# Altium PCB PCB1.PcbDoc
Units mm, origin at the board's own origin, x right, y up, seen from the top; angles counter-clockwise.
Board outline 102.36 x 69.6 mm, 2 copper layers (Top Layer, Bottom Layer); 56 components, 39 nets, 199 pads, 28 vias.
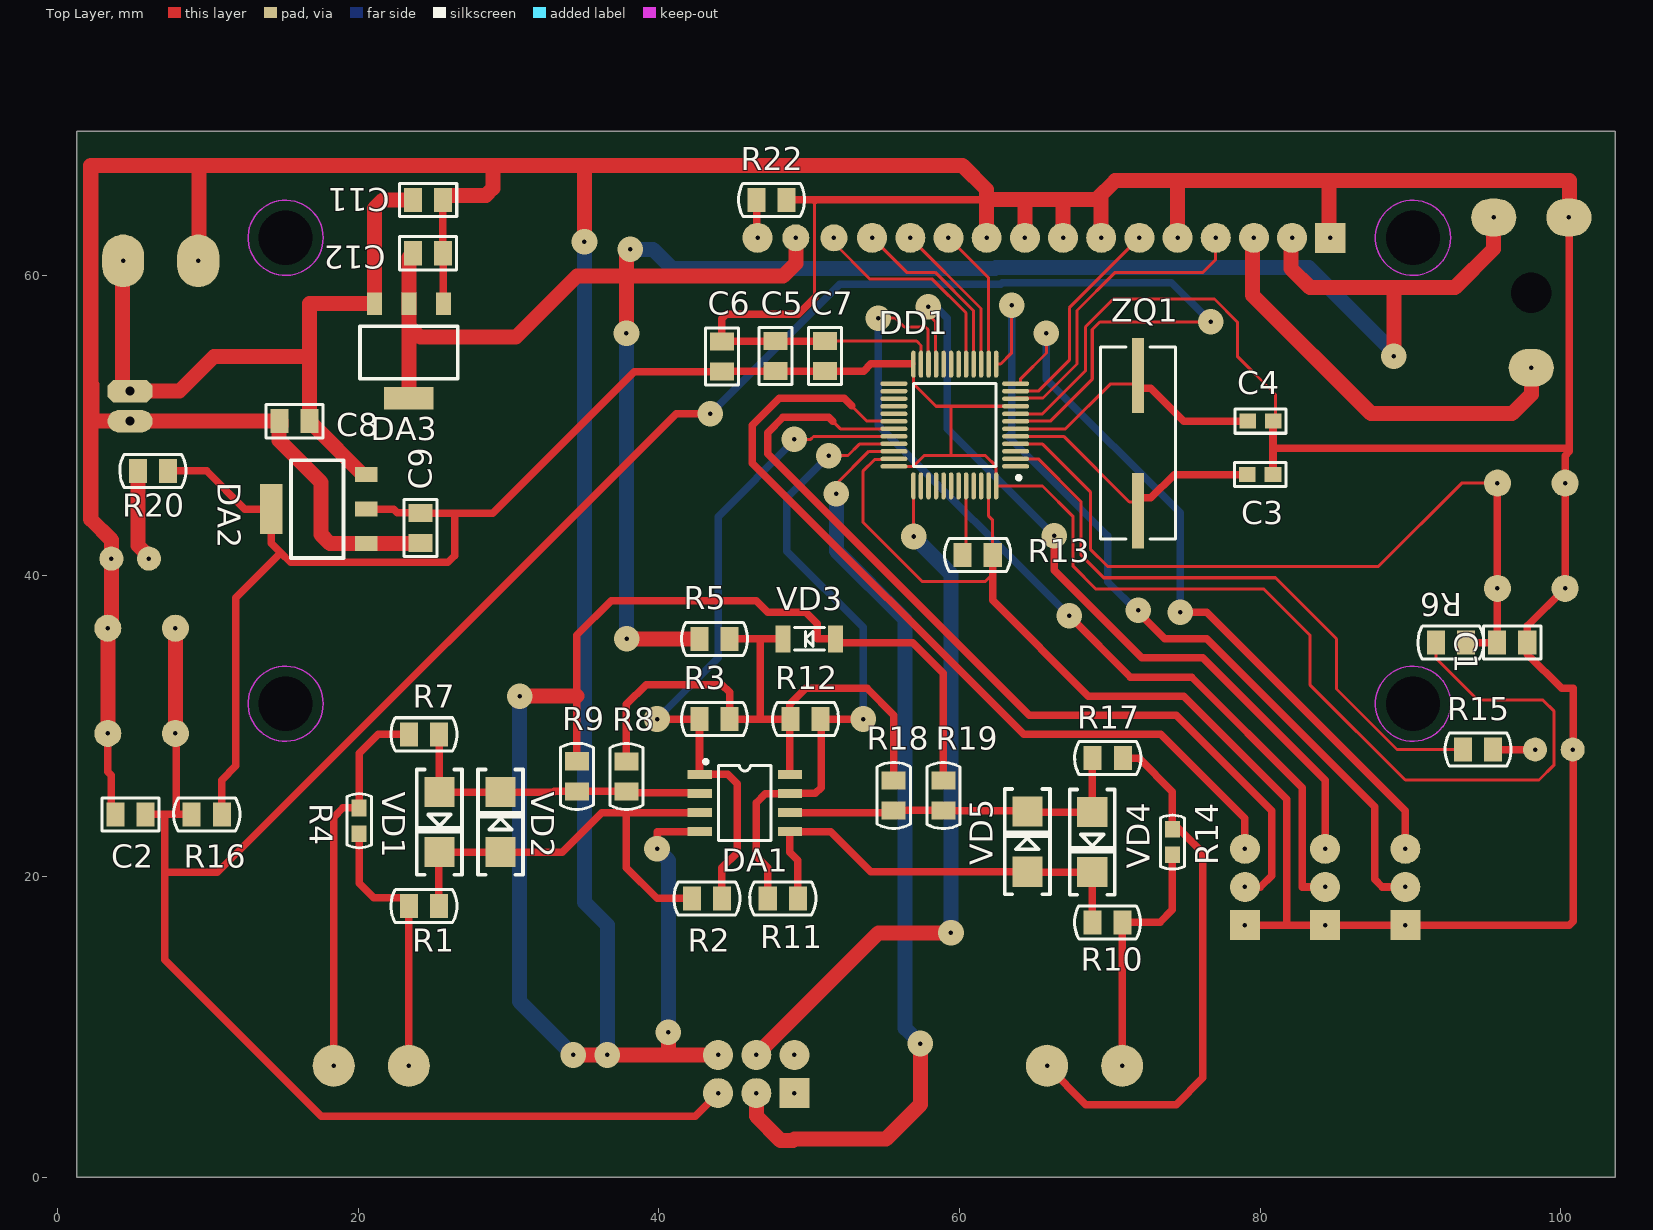
[diagram p0: Top Layer view]
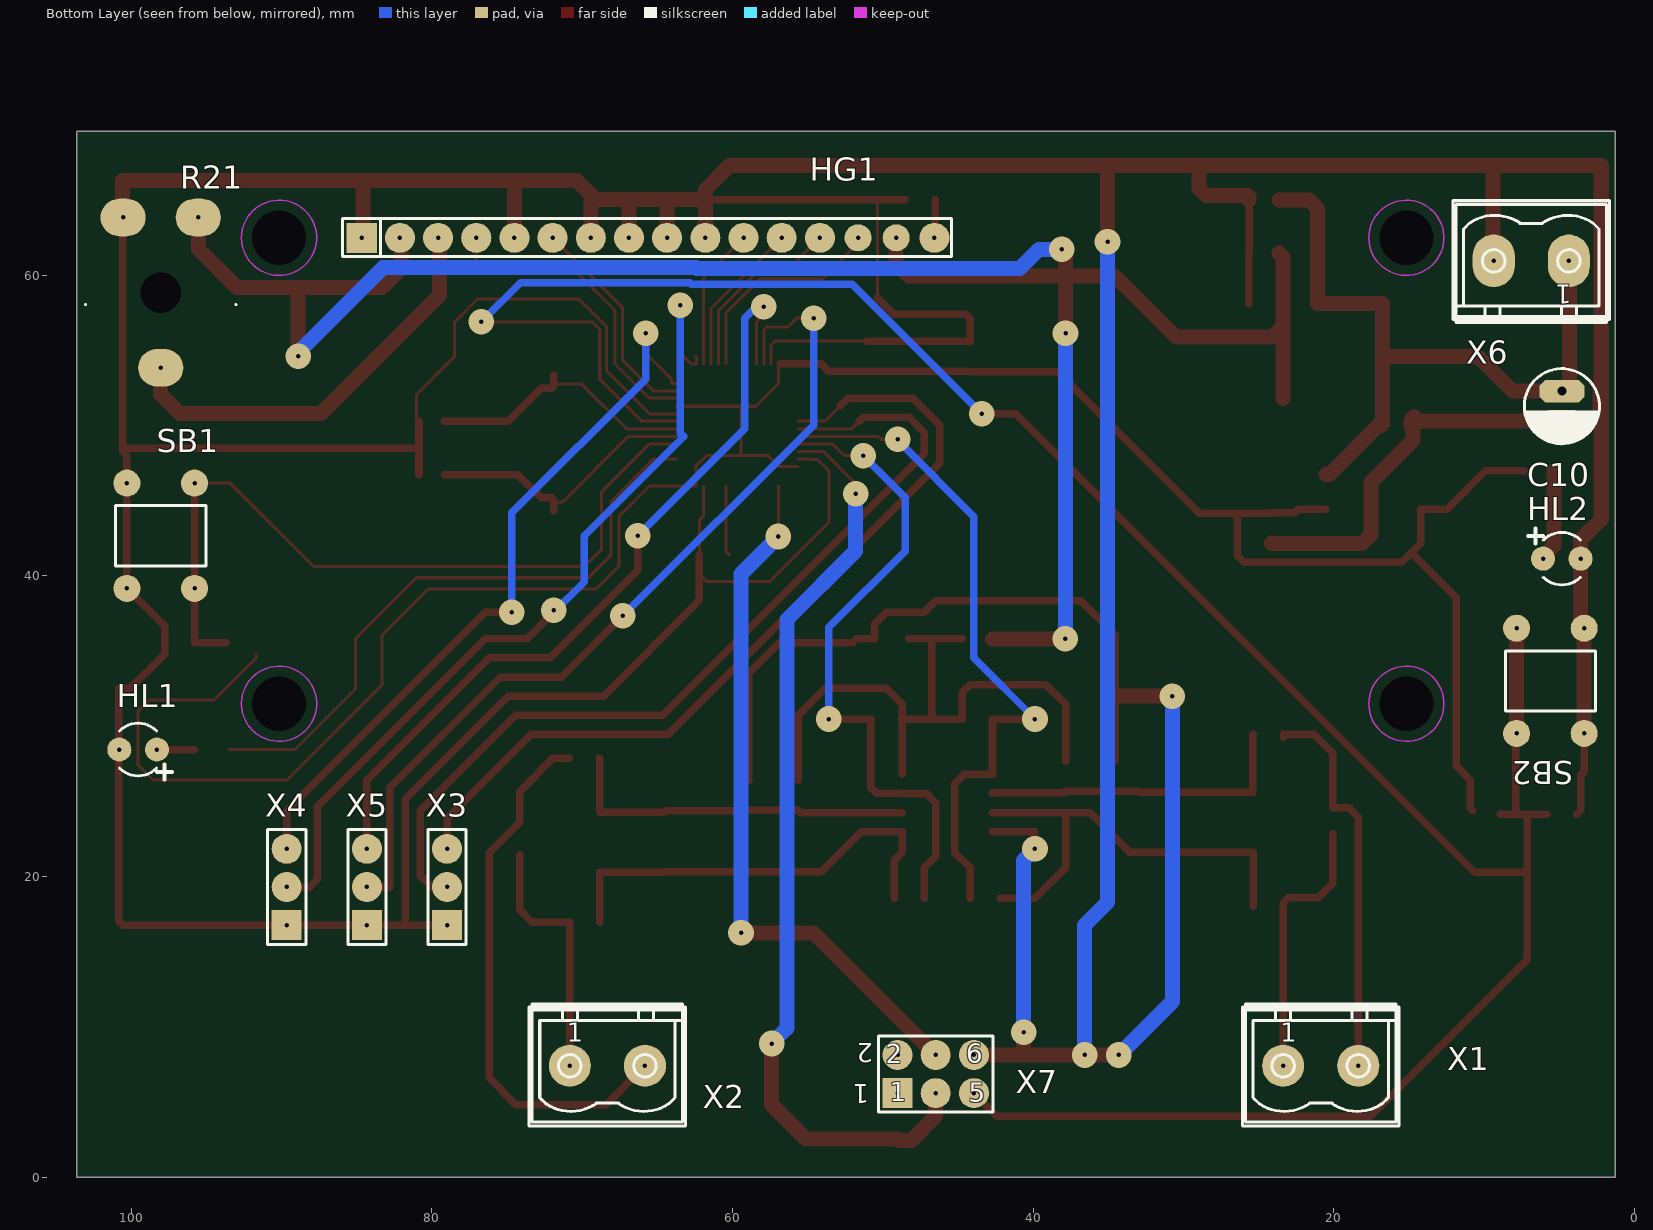
[diagram p1: Bottom Layer view, seen from below]

## Layer stack, top to bottom
Top Solder: solder mask 0.0102, Solder Resist, Dk 3.5
Top Layer: signal copper 0.0356
Dielectric 1: dielectric 0.32, FR-4, Dk 4.8
Bottom Layer: signal copper 0.0356
Bottom Solder: solder mask 0.0102, Solder Resist, Dk 3.5

## Board outline
1.27,0 1.27,62.23 1.27,69.596 103.632,69.596 103.632,0

## Design rules (kind name [scope] priority, off if disabled: settings)
Clearance [All] p1: gap=0.5 ignorepadtopadclearanceinfootprint=FALSE except(0: Arc-SMDPad Arc-Hole Track-SMDPad Track-Hole SMDPad-SMDPad SMDPad-Hole THPad-Hole Via-Hole Fill-Hole Poly-Hole Region-Hole Text-Hole; 0.254: Arc-Arc Arc-Track Arc-THPad Arc-Via Arc-Text Track-Track Track-THPad Track-Via Track-Text SMDPad-THPad SMDPad-Via SMDPad-Text THPad-THPad THPad-Via THPad-Text Via-Via Via-Text Fill-Text Poly-Text Region-Text Text-Text)
PlaneConnect [All] p1: planeconnectstyle=Relief reliefexpansion=0.508 reliefentries=4 reliefconductorwidth=0.7 reliefairgap=0.7
PolygonConnect [All] p1: connectstyle=Relief reliefconductorwidth=0.7 reliefentries=4 polygonreliefangle="90 Angle" airgapwidth=0.254
RoutingVias [All] p1: holewidth=0.711 width=1.27 viastyle="Through Hole" minholewidth=0.711 minwidth=1.27 maxholewidth=0.711 maxwidth=1.27
SolderMaskExpansion [All] p1: expansion=0.102
Width [All] p1: maxlimit=2 minlimit=0.2 preferedwidth=1 minimp=50.000000 maximp=50.000000 favimp=50.000000
29 further rules are at their usual default settings.

## Components (designator, comment, footprint, x,y, rotation, side; value= is the part's Value field where it differs from the comment)
C1 "Capacitor" C0805 96.774,35.56 r180 top value=0.1uF
C2 "Capacitor" C0805 4.842,24.13 r0 top value=0.1uF
C3 "Capacitor" C0603 80.01,46.736 r180 top value=0.022uF
C4 "Capacitor" C0603 80.026,50.292 r180 top value=0.022uF
C5 "Capacitor" C0805 47.752,54.626 r270 top value=0.1uF
C6 "Capacitor" C0805 44.196,54.594 r270 top value=0.1uF
C7 "Capacitor" C0805 51.054,54.626 r270 top value=0.1uF
C8 "Capacitor" C0805 15.748,50.292 r0 top value=0.1uF
C9 "Capacitor" C0805 24.13,43.18 r90 top value=10uF
C10 "Aluminium capacitor, 100μF, 16V, ±20%, 54mOhm, 14x10x5 mm, -55...+105°C" "CAP: D5C2H11" 4.826,51.292 r270 bottom value=100?F
C11 "Capacitor" C0805 24.654,65.024 r180 top value=0.1uF
C12 "Capacitor" C0805 24.638,61.468 r180 top value=10uF
DA1 "COMP_2x_8p" SOIC-8 45.72,24.892 r270 top value=LM293AD
DA2 "LM1117-Series" SOT-223 17.272,44.45 r90 top value=LM1117MPX-3.3
DA3 "LM1117-Series" SOT-223 23.368,54.864 r180 top value=LM1117MPX-3.3
DD1 "STM32F103Cxxx-Series" LQFP-48 59.69,50.038 r180 top value=STM32F103C8T6
HG1 "QC1602AV2_0" "QC1602AV2_0 _PLS" 84.67,62.496 r180 bottom locked
HL1 "Text" LD-3mm-G 99.548,28.448 r0 bottom value=BL-L314UGC
HL2 "Power" LD-3mm-R 4.826,41.148 r180 bottom value=BL-L314HD
R1 "Resistor" R0805 24.368,18.034 r0 top value=10k
R2 "Resistor" R0805 43.196,18.542 r0 top value=33k
R3 "Resistor" R0805 43.704,30.48 r180 top value=1k
R4 "Resistor" R0603 20.066,23.71 r270 top value=20k
R5 "Resistor" R0805 43.704,35.814 r180 top value=470
R6 "Resistor" R0805 92.694,35.56 r0 top value=10k
R7 "Resistor" R0805 24.368,29.464 r0 top value=10k
R8 "Resistor" R0805 37.846,26.654 r90 top value=2k
R9 "Resistor" R0805 34.544,26.67 r270 top value=1k
R10 "Resistor" R0805 69.85,16.954 r180 top value=10k
R11 "Resistor" R0805 48.244,18.542 r180 top value=33k
R12 "Resistor" R0805 49.768,30.48 r0 top value=1k
R13 "Resistor" R0805 61.214,41.402 r180 top value=10k
R14 "Resistor" R0603 74.168,22.288 r270 top value=20k
R15 "Resistor" R0805 94.504,28.448 r0 top value=1k
R16 "Resistor" R0805 9.922,24.13 r180 top value=10k
R17 "Resistor" R0805 69.866,27.876 r180 top value=10k
R18 "Resistor" R0805 55.626,25.4 r90 top value=2k
R19 "Resistor" R0805 58.928,25.384 r270 top value=1k
R20 "Resistor" R0805 6.334,46.99 r180 top value=1k
R21 "Potentiometer" CA9V 95.544,63.848 r0 bottom value=10К
R22 "Resistor" R0805 47.498,65.024 r0 top value=2k
SB1 "Text" TS-A3PS 98.044,42.672 r0 bottom value=TS-A3PS-130
SB2 "Text" TS-A3PS 5.588,33.02 r180 bottom value=TS-A3PS-130
VD1 "Diode" DO-214AC 25.4,23.622 r270 top value=ES1F
VD2 "Diode" DO-214AC 29.464,23.622 r90 top value=ES1F
VD3 "Zener" SOD-80 50.01,35.814 r180 top value=BZV55-C5V1
VD4 "Diode" DO-214AC 68.834,22.288 r270 top value=ES1F
VD5 "Diode" DO-214AC 64.516,22.32 r90 top value=ES1F
X1 "Канал ДОК1" 2EDGV-5.0-02P-14#1 20.868,7.41 r180 bottom
X2 "Канал ДОК2" 2EDGV-5.0-02P-14#1 68.326,7.41 r180 bottom
X3 "Разъем PLS-3" HDR1X3 78.994,16.764 r90 bottom
X4 "Разъем PLS-3" HDR1X3 89.662,16.764 r90 bottom
X5 "Разъем PLS-3" HDR1X3 84.328,16.764 r90 bottom
X6 "Питание" 2EDGV-5.0-02P-14#2 6.858,60.96 r0 bottom
X7 "Вилка SWD _ ST_LINK" PLD6 49.022,5.588 r180 bottom value=SWD
ZQ1 "Crystal" HC-49SM 71.882,48.84 r270 top value=HC49S-8.000MHZ-20pF

## Footprints (in the part's own frame and the unit in brackets; to place one, negate y for a bottom-side part, rotate by r counter-clockwise, add the part's x,y. Pads: shape width x height; smd on the part's side, far side on the other; paste and mask are expansions set on the pad)
2EDGV-5.0-02P-14#1 [mm] "Pin Header 5mm"
  round 2.8 hole 0.3: 1(-2.5,0) 2(2.5,0)
  silkscreen extent -5.2,-4 5.2,4.1, body extent -5,-3.87 5,4.73, height 12
2EDGV-5.0-02P-14#2 [mm] "Pin Header 5mm"
  oval 2.8x3.5 hole 0.3: 1(-2.5,0) 2(2.5,0)
  silkscreen extent -5.2,-4 5.2,4.1, body extent -5,-3.87 5,4.73, height 12
C0603 [mm] "1608M"
  rect 1.1x1 smd: 1(-0.85,0) 2(0.85,0)
  silkscreen extent -1.7,-0.8 1.7,0.8, body extent -0.8,-0.4 0.8,0.4, height 0.91
C0805 [mm] "2012M"
  rect 1.2x1.6 smd: 1(-1,0) 2(1,0)
  silkscreen extent -1.9,-1.1 1.9,1.1, body extent -1,-0.62 1,0.63, height 1.01
CA9V [mm]
  round 0 hole 2.7 unplated: 0(2.5,5)
  oval 3x2.5 hole 0.3: 1(0,0) 2(5,0) 3(2.5,10)
  silkscreen extent -2.55,5.75 7.55,5.85, body extent -2.5,-0.1 7.5,10.1, height 6.15
"CAP: D5C2H11" [mm]
  oct 1.5x3 hole 0.6: 1(-1,0)
  oval 1.5x3 hole 0.6: 2(1,0)
  silkscreen extent -2.5,-2.5 2.5,2.5, body extent -2.75,-2.75 2.75,2.75, height 13.5
DO-214AC [mm] "(SMA) Low profile package"
  rect 2x2 smd: 1(-2,0) 2(2,0)
  silkscreen extent -3.5,-1.5 3.5,1.5, body extent -2.6,-1.3 2.6,1.3, height 2.4
HC-49SM [mm] "HC49 Surface Mount Footprint"
  rect 5x0.8 smd: 1(-4.5,0) 3(4.5,0)
  silkscreen extent -6.4,-2.5 6.4,2.5, body extent -6.25,-2.4 6.25,2.4, height 4.02
HDR1X3 [mm]
  rect 2x2 hole 0.3: 1(0,0)
  round 2 hole 0.3: 2(2.54,0) 3(5.08,0)
  silkscreen extent -1.27,-1.27 6.35,1.27, body extent -1.28,-1.27 6.36,1.27, height 8.54
LD-3mm-G [mm] "3mm DIP Green Led Footprint"
  round 1.6 hole 0.3: 1(-1.25,0) 2(1.25,0)
  silkscreen extent -2.25,-1.75 1.24,2, body extent -1.65,-1.69 1.65,1.61, height 7.01
LD-3mm-R [mm] "3mm DIP Red Led Footprint"
  round 1.6 hole 0.3: 1(-1.25,0) 2(1.25,0)
  silkscreen extent -2.25,-1.75 1.24,2, body extent -1.65,-1.69 1.65,1.61, height 7.01
LQFP-48 [mm] "Thin QFP, 48-Leads, Body 7x7mm, Pitch 0.5mm, IPC Medium Density"
  oval 1.8x0.3 smd: 1(-4.05,2.75) 2(-4.05,2.25) 3(-4.05,1.75) 4(-4.05,1.25) 5(-4.05,0.75) 6(-4.05,0.25) 7(-4.05,-0.25) 8(-4.05,-0.75) 9(-4.05,-1.25) 10(-4.05,-1.75) 11(-4.05,-2.25) 12(-4.05,-2.75) 25(4.05,-2.75) 26(4.05,-2.25) 27(4.05,-1.75) 28(4.05,-1.25) 29(4.05,-0.75) 30(4.05,-0.25) 31(4.05,0.25) 32(4.05,0.75) 33(4.05,1.25) 34(4.05,1.75) 35(4.05,2.25) 36(4.05,2.75)
  oval 0.3x1.8 smd: 13(-2.75,-4.05) 14(-2.25,-4.05) 15(-1.75,-4.05) 16(-1.25,-4.05) 17(-0.75,-4.05) 18(-0.25,-4.05) 19(0.25,-4.05) 20(0.75,-4.05) 21(1.25,-4.05) 22(1.75,-4.05) 23(2.25,-4.05) 24(2.75,-4.05) 37(2.75,4.05) 38(2.25,4.05) 39(1.75,4.05) 40(1.25,4.05) 41(0.75,4.05) 42(0.25,4.05) 43(-0.25,4.05) 44(-0.75,4.05) 45(-1.25,4.05) 46(-1.75,4.05) 47(-2.25,4.05) 48(-2.75,4.05)
  silkscreen extent -4.38,-2.75 2.75,3.62, body extent -4.5,-4.5 4.5,4.5, height 1.5
PLD6 [mm]
  rect 2x2 hole 0.3: 1(0,0)
  round 2 hole 0.3: 2(0,2.54) 3(2.54,0) 4(2.54,2.54) 5(5.08,0) 6(5.08,2.54)
  silkscreen extent -1.27,-1.27 6.35,3.81, body extent -1.25,-1.23 6.37,3.78, height 8.5
"QC1602AV2_0 _PLS" [mm]
  round 0.1 hole 3.6 unplated: 0(-5.5,-31) 0(-5.5,0) 0(69.5,-31) 0(69.5,0)
  rect 2x2 hole 0.3: 1(0,0)
  round 2 hole 0.3: 2(2.54,0) 3(5.08,0) 4(7.62,0) 5(10.16,0) 6(12.7,0) 7(15.24,0) 8(17.78,0) 9(20.32,0) 10(22.86,0) 11(25.4,0) 12(27.94,0) 13(30.48,0) 16(38.1,0)
  round 1.8 hole 0.3: 14(33.02,0) 15(35.56,0)
  Keep-Out Layer circle w0.1: c-5.5,-31 r2.5
  Keep-Out Layer circle w0.1: c-5.5,0 r2.5
  Keep-Out Layer circle w0.1: c69.5,0 r2.5
  Keep-Out Layer circle w0.1: c69.5,-31 r2.5
  silkscreen extent -1.27,-1.25 39.25,1.27, body extent -8,-33.5 72.25,2.5, height 13.4
R0603 [mm] "1608M"
  rect 1.1x1 smd: 1(-0.85,0) 2(0.85,0)
  silkscreen extent -1.8,-0.8 1.8,0.8, body extent -0.8,-0.4 0.8,0.4, height 0.38
R0805 [mm] "2012M"
  rect 1.2x1.6 smd: 1(-1,0) 2(1,0)
  silkscreen extent -2.2,-1.1 2.2,1.1, body extent -1,-0.6 1,0.6, height 0.5
SOD-80 [mm]
  rect 1x1.8 smd: 1(-1.75,0) 2(1.75,0)
  silkscreen extent -1,-0.75 1,0.75, body extent -1.68,-0.74 1.68,0.8, height 1.52
SOIC-8 [mm] "4320.8-А Small Outline; 8 Leads; Body Width 3.9 mm; Pitch 1.27 mm"
  rect 0.6x1.6 smd: 1(-1.905,-3) 2(-0.635,-3) 3(0.635,-3) 4(1.905,-3) 5(1.905,3) 6(0.635,3) 7(-0.635,3) 8(-1.905,3)
  silkscreen extent -2.88,-2.72 2.5,1.75, body extent -2.5,-3.01 2.5,3.01, height 1.75
SOT-223 [mm]
  rect 1x1.5 smd: 1(-2.3,-3.25) 2(0,-3.25) 3(2.3,-3.25)
  rect 3.3x1.5 smd: 2(0,3.05)
  silkscreen extent -3.25,-1.75 3.25,1.75, body extent -3.25,-3.53 3.25,3.43, height 1.65
TS-A3PS [mm] "1 contact, 0.02A, 15V, H=7mm"
  round 1.8 hole 0.3: 1(-2.25,-3.5) 1(-2.25,3.5) 2(2.25,-3.5) 2(2.25,3.5)
  silkscreen extent -3,-2 3,2, body extent -3,-3.75 3,3.75, height 9

## Part data
C1 C2 C5 C6 C7 C8 C11: library part GRM21BR71H104KA01L, Dielectric Type=X7R, Manufacturer=Murata, Tolerance=±10%, Voltage=50V, Working Temperature Max=+125°С, Working Temperature Min=-55°С, Application Category=1, ID=138, Part Number=GRM21BR71H104KA01L, Published=18.05.2010, Publisher="Andrew Danich", Type=Конденсатор
C3 C4: library part GRM188R71E223KA01D, Dielectric Type=X7R, Manufacturer=Murata, Tolerance=±10%, Voltage=25V, Working Temperature Max=+125°С, Working Temperature Min=-55°С, Application Category=1, ID=128, Part Number=GRM188R71E223KA01D, Published=18.05.2010, Publisher="Andrew Danich", Type=Конденсатор
C9 C12: library part GRM21BR61E106KA73L, Dielectric Type=X5R, Manufacturer=Murata, Tolerance=±10%, Voltage=25V, ID=53, Part Number=GRM21BR61E106KA73L, Published=18.05.2010, Publisher="Andrew Danich", Type=Конденсатор
C10: library part Aluminium, Manufacturer=Wurth, Package="14x10x5 mm", PartNumber=860080475013, Temperature=-55...+105°C, Tolerance=±20%, TypeCapacitor="Aluminium capacitor", ValueManufacturerPartNumber="Aluminium capacitor, 100?F, 16V, ±20%, 54mOhm, 14x10x5 mm, -55...+105°C", Voltage=16V, HelpURL=https://www.digikey.com/product-detail/en/wurth-electronics-inc/860080475013/732-9029-1-ND/5728972, Impedance=54mOhm
DA1: library part LM293AD, Input Biasing Current=100nA, Input Offset Voltage=±2mV, Manufacturer="Texas Instruments", Output Saturation Voltage=400mV, Supply Current=1mA, Working Temperature Max=+85°C, Working Temperature Min=-25°C, Application Category=1, Channels=2, Functional Analog="LM2903MX, LM393MX", ID=3, Part Number=LM293AD, Publisher="Viktor Klishin", Response Time=1.3uS, Supply Operation=+2…36V, Type=Микросхема
DA2: library part LM1117MPX-3.3, Input Voltage=+8.5…20V, Output Current=800mA, Output Voltage=+3,3V, ID=9, Part Number=LM1117MPX-3.3, Published=13.08.2015, Publisher="Andrew Danich", Type=Микросхема
DA3: library part LM1117MPX-3.3, Input Voltage=+8.5…20V, Output Current=800mA, Output Voltage=+5V, ID=9, Part Number=LM1117MPX-3.3, Published=13.08.2015, Publisher="Andrew Danich", Type=Микросхема
DD1: library part STM32F103C8T6, Manufacturer=STMicroelectronics, Operation Frequency=72MHz, Working Temperature Max=+85°С, Working Temperature Min=-40°С, Application Category=1, EEPROM=-, Flash=64K, I/O Lines=37, ID=20, Part Number=STM32F103C8T6, Prog Interface="JTAG, SWD, UART", Published=16.10.2015, Publisher="Andrew Danich", SRAM=20K, Supply Operation=+2.0…3.6V, Type=Микросхема
HG1: library part "QC1602AV2_0 _PLS", ChipdipURL=https://www.chipdip.ru/product/bcb1602-03, ComponentLink1Description=Datashet, ComponentLink1URL=https://www.openhacks.com/uploadsproductos/eone-1602a1.pdf, ID=1, Name=LCD16X2, Part Number="QC1602AV2_0 _PLS", Published=28.08.2014, Publisher="Andrew Danich", Type="Индикатор графический"
HL1: library part BL-L314UGC, Color="Ultra Green", Forward Current=30mA, Forward Voltage=2.2V, Power Dissipation=75mW, Application Category=1, ID=1, Leds=1, Part Number=BL-L314UGC, Published=03.12.2013, Publisher="Andrew Danich", Type="Индикатор единичный"
HL2: library part BL-L314HD, Color=Red, Forward Current=25mA, Forward Voltage=2.25V, Power Dissipation=60mW, Application Category=1, ID=2, Leds=1, Part Number=BL-L314HD, Published=03.12.2013, Publisher="Andrew Danich", Type="Индикатор единичный"
R1 R6 R7 R10 R13 R16 R17: library part RC0805JR-0710KL, Limit Voltage=150V, Manufacturer=Yageo, Temperature Coefficient=100ppm, Tolerance=±5%, Total Power Dissipation=0.125W, Working Temperature Max=+155°С, Working Temperature Min=-55°С, Application Category=1, ID=99, Part Number=RC0805JR-0710KL, Published=24.03.2010, Publisher="Andrew Danich", Series Type=Thick-Film, Type=Резистор
R2 R11: library part RC0805JR-0733KL, Limit Voltage=150V, Manufacturer=Yageo, Temperature Coefficient=100ppm, Tolerance=±5%, Total Power Dissipation=0.125W, Working Temperature Max=+155°С, Working Temperature Min=-55°С, Application Category=1, ID=136, Part Number=RC0805JR-0733KL, Published=24.03.2010, Publisher="Andrew Danich", Series Type=Thick-Film, Type=Резистор
R3 R9 R12 R15 R19 R20: library part RC0805JR-071KL, Limit Voltage=150V, Manufacturer=Yageo, Temperature Coefficient=100ppm, Tolerance=±5%, Total Power Dissipation=0.125W, Working Temperature Max=+155°С, Working Temperature Min=-55°С, Application Category=1, ID=112, Part Number=RC0805JR-071KL, Published=24.03.2010, Publisher="Andrew Danich", Series Type=Thick-Film, Type=Резистор
R4 R14: library part RC0603FR-0720KL, Limit Voltage=50V, Manufacturer=Yageo, Temperature Coefficient=100ppm, Tolerance=±1%, Total Power Dissipation=0.1W, Working Temperature Max=+155°С, Working Temperature Min=-55°С, Application Category=1, ID=259, Part Number=RC0603FR-0720KL, Published=24.03.2010, Publisher="Andrew Danich", Series Type=Thick-Film, Type=Резистор
R5: library part RC0805JR-07470RL, Limit Voltage=150V, Manufacturer=Yageo, Temperature Coefficient=100ppm, Tolerance=±5%, Total Power Dissipation=0.125W, Working Temperature Max=+155°С, Working Temperature Min=-55°С, Application Category=1, ID=144, Part Number=RC0805JR-07470RL, Published=24.03.2010, Publisher="Andrew Danich", Series Type=Thick-Film, Type=Резистор
R8 R18 R22: library part RC0805JR-072KL, Limit Voltage=150V, Manufacturer=Yageo, Temperature Coefficient=100ppm, Tolerance=±5%, Total Power Dissipation=0.125W, Working Temperature Max=+155°С, Working Temperature Min=-55°С, Application Category=1, ID=129, Part Number=RC0805JR-072KL, Published=24.03.2010, Publisher="Andrew Danich", Series Type=Thick-Film, Type=Резистор
R21: library part CA9PV10-10KA2020, Nominal value=10, ChipdipURL=https://www.chipdip.ru/product0/9000079478, ComponentLink1Description=Datashet, ComponentLink1URL=https://static.chipdip.ru/lib/250/DOC000250611.pdf, ID=6, Name=Resistor, Part Number=CA9PV10-10KA2020, SortUnit=2, Type=Резистор, Units=К
SB1 SB2: library part TS-A3PS-130, Isolator Resistance=100meg, Limit Current=50mA, Limit Voltage=250V, Resistance=0.1ohm, Application Category=1, Backlight=NO, Height=7mm, ID=24, Number of Contacts=4, Part Number=TS-A3PS-130, Published=17.04.2014, Publisher="Andrew Danich", Type=Переключатель
VD1 VD2 VD4 VD5: library part ES1G, Capacitance=10pF, Forward Current=1A, Forward Voltage=1.3V, Reverse Current=5uA, Reverse Voltage=400V, Total Power Dissipation=1.47W, ID=3, Part Number=ES1G, Published=18.05.2010, Publisher="Andrew Danich", Recovery Time=35nS, Type=Диод
VD3: library part BZV55-C5V1, Capacitance=300pF, Differential resistance=60ohm, Forward Current=250mA, Forward Voltage=0.9V, Reverse Current=2uA, Total Power Dissipation=0.5W, Working Voltage=5.1V, ID=1, Part Number=BZV55-C5V1, Published=20.05.2013, Publisher="Andrew Danich", Type=Стабилитрон
X1 X2 X6: library part "Вилка 2EDGV-5.08-02P"
X3 X4 X5: library part "Вилка 3pin", "Вилка штыревая 2.54мм 1x3 прямая в отверстия"
X7: "Вилка 2x3 pin 2.54 mm в отверстия"
ZQ1: library part HC49SM-8.000MHz-20pF, Load Capacitance=20pF, Output Frequency=8MHz, Temperature Coefficient=±50ppm, Application Category=1, ID=17, Part Number=HC49SM-8.000MHz-20pF, Published=08.03.2013, Publisher="Andrew Danich", Type=Резонатор

## Via types
v1: diameter 1.7, hole 0.3, Top Layer to Bottom Layer, 28 vias

## Nets (pads, with @x,y where several pads share a name; then routed paths per layer and width w, separated by ;. In a path a pad name is that pad's centre, name@x,y a point inside that pad or via, vN(x,y) a via of type N, cw(c..) or ccw(c..) an arc to the next point about the centre after c; other vN are vias at no path point)
+3,3V: C5.2 C6.2 C7.2 C9.2 DA2.2 DD1.9 DD1.24 DD1.36 DD1.48 R6.1 R16.1 R20.1 | length 168.8
  Top Layer w0.2: DD1.36 56.94,47.288 57.678,48.026 59.436,48.026 ; DD1.24@56.986,54.088 DD1.24 56.94,52.788 58.44,51.288 59.436,51.288 ; DD1.9 59.436,51.288 ; R6.1@91.694,34.798 91.694,34.544 94.488,31.75 98.806,31.75 99.568,30.988 99.568,27.432 98.552,26.416 89.662,26.416 83.312,32.766 83.312,36.068 80.264,39.116 69.088,39.116 67.564,40.64 67.564,43.942 65.518,45.988 DD1.48 62.44,47.288 61.702,48.026 59.436,48.026 ; 59.436,48.026 59.436,51.288
  Top Layer w0.5: R20.1 9.906,46.99 12.446,44.45 14.222,44.45 14.222,42.166 14.858,41.53 ; R16.1@10.746,24.384 10.922,24.56 10.922,26.416 11.866,27.36 11.866,38.538 14.858,41.53 ; DA2.2@20.522,44.45 22.352,44.45 22.606,44.196 24.114,44.196 C9.2 26.422,44.18 ; DD1.24@56.822,54.102 54.102,54.102 53.626,53.626 C7.2 C5.2 44.228,53.626 C6.2 38.354,53.594 28.94,44.18 26.422,44.18 ; 14.858,41.53 15.494,40.894 25.958,40.894 26.422,41.358 26.422,44.18
+5V: C12.2 DA3.2 HG1.2 HG1.15 R5.2 R21.1 | length 148.2
  Top Layer w1: DA3.2@23.368,51.814 23.368,56.642 ; C12.2 23.368,61.198 23.368,58.114 23.368,56.642 ; v1(37.846,56.134) 37.846,59.944 ; v1(37.864,35.814) R5.2 ; v1(38.1,61.722) 38.1,61.649 37.846,61.395 37.846,59.944 ; HG1.15 49.11,60.794 48.26,59.944 37.846,59.944 ; HG1.2@82.042,62.484 82.042,60.452 83.314,59.18 88.9,59.18 ; v1(88.9,54.61) 88.9,59.18 ; R21.1 95.544,61.762 92.962,59.18 88.9,59.18 ; 23.368,56.642 24.13,55.88 30.48,55.88 34.544,59.944 37.846,59.944
  Bottom Layer w1: v1(37.846,56.134) 37.846,35.814 v1(37.864,35.814) ; v1(38.1,61.722) 39.624,61.722 40.894,60.452 62.367,60.452 62.439,60.524 83.24,60.524 88.848,54.916 88.848,54.662 v1(88.9,54.61)
D4: DD1.14 HG1.11 | length 9.5
  Top Layer w0.2: HG1.11 61.94,59.826 DD1.14
D5: DD1.15 HG1.12 | length 10.4
  Top Layer w0.2: HG1.12 61.44,57.786 DD1.15
D6: DD1.16 HG1.13 | length 12.3
  Top Layer w0.2: HG1.13 56.488,60.198 58.386,60.198 60.94,57.644 DD1.16
D7: DD1.17 HG1.14 | length 14.5
  Top Layer w0.2: HG1.14 51.65,62.149 54.055,59.744 58.198,59.744 60.44,57.502 DD1.17
DR1: DA1.1 DD1.32 R2.2 R3.2 | length 46.1
  Top Layer w0.2: v1(49.022,49.085) 50.102,49.085 50.292,49.276 DD1.32@55.372,49.276
  Top Layer w0.5: v1(39.878,30.48) R3.2 42.704,26.813 DA1.1 44.577,26.797 45.212,26.162 45.212,21.59 44.196,20.574 R2.2
  Bottom Layer w0.5: v1(39.878,30.48) 43.942,34.544 43.942,43.942 49.022,49.022 v1(49.022,49.085)
DR2: DA1.7 DD1.33 R11.2 R12.2 | length 44.3
  Top Layer w0.2: v1(51.308,48.006) 52.578,48.006 53.341,48.769 55.621,48.769 DD1.33
  Top Layer w0.5: R11.2 47.244,20.574 46.482,21.336 46.482,24.892 47.084,25.494 48.687,25.494 DA1.7 50.419,25.527 50.8,25.908 50.8,30.448 R12.2 v1(53.594,30.48)
  Bottom Layer w0.5: v1(51.308,48.006) 48.514,45.212 48.514,41.656 53.594,36.576 v1(53.594,30.48)
E: DD1.11 HG1.6 | length 14.5
  Top Layer w0.2: DD1.11 65.242,52.288 67.31,54.356 67.31,57.836 HG1.6
GND: C1.1 C2.1 C3.1 C4.1 C5.1 C6.1 C7.1 C8.1 C9.1 C10.2 C11.1 C12.1 DA1.4 DA2.1 DA3.1 DD1.8 DD1.23 DD1.35 DD1.47 HG1.1 HG1.5 HG1.7 HG1.8 HG1.9 HG1.10 HL1.2 HL2.2 R9.1 R13.1 R19.1 R21.2 R22.2 SB1.2 SB2.2 VD3.1 X3.1 X4.1 X5.1 X6.2 X7.6 | length 601.2
  Top Layer w0.2: 50.364,58.492 50.364,64.952 ; C7.1 57.15,55.626 57.44,55.336 DD1.23 ; DD1.35 55.621,47.769 54.8,47.769 54.783,47.752 54.356,47.752 53.594,46.99 53.594,43.551 57.521,39.624 61.722,39.624 62.214,40.116 ; DD1.47 61.94,43.978 62.214,43.704 R13.1 ; DD1.8 65.52,50.788 68.38,53.648 68.38,56.576 70.224,58.42 76.962,58.42 78.486,56.896 78.486,54.61 81.026,52.07 81.026,50.442 C4.1
  Top Layer w0.5: SB2.2@3.338,29.52 3.338,26.96 3.556,26.742 C2.1@3.556,24.416 ; C2.1@3.81,24.162 C2.1 ; C11.1 25.638,65.008 C12.1 25.668,61.438 DA3.1 ; R9.1 34.544,32.004 34.544,36.068 36.83,38.354 46.482,38.354 47.244,37.592 49.784,37.592 50.546,36.83 50.546,35.814 VD3.1 ; v1(39.878,21.844) 39.878,22.987 DA1.4 ; R22.2 50.292,65.024 ; 50.364,58.492 49.276,57.404 44.489,57.404 44.196,57.111 C6.1 44.228,55.626 C5.1 C7.1 ; 50.364,64.952 50.292,65.024 ; VD3.1@52.01,35.56 56.896,35.56 58.928,33.528 R19.1 ; 61.722,65.024 50.292,65.024 ; R13.1 62.214,40.116 62.214,38.37 68.58,32.004 74.93,32.004 81.788,25.146 81.788,16.891 81.661,16.764 ; X3.1 81.661,16.764 ; C3.1 80.86,48.506 ; C4.1 80.86,50.276 80.86,48.506 ; R21.2@99.782,63.848 100.584,63.046 100.584,48.506 ; 80.86,48.506 100.584,48.506 ; 81.661,16.764 X5.1 X4.1 100.584,16.764 100.838,17.018 100.838,28.448 100.838,32.512 100.076,32.512 97.79,34.798 97.79,35.56 97.79,36.668 100.294,39.172 100.294,46.172 100.294,47.994 100.584,48.284 100.584,48.506
  Top Layer w1: 2.204,50.292 2.204,43.77 ; 2.286,52.705 2.286,50.292 C10.2 C8.1@14.148,50.292 ; SB2.2@3.338,29.52 3.338,36.52 3.338,36.736 3.576,36.974 HL2.2 3.576,42.398 2.204,43.77 ; X6.2@9.398,62.484 9.398,67.31 ; C8.1@14.648,50.592 14.748,50.492 C8.1 C8.1@14.748,50.192 ; C9.1 24.1,42.15 DA2.1 19.979,42.15 19.965,42.164 18.112,42.164 17.526,42.75 17.526,46.228 14.732,49.022 14.732,50.176 C8.1@14.748,50.192 ; C11.1 25.654,65.224 25.754,65.324 28.494,65.324 28.956,65.786 28.956,67.31 ; v1(30.734,32.004) 34.544,32.004 ; v1(34.29,8.128) v1(36.576,8.128) 40.64,8.128 ; v1(35.052,62.23) 35.052,67.31 ; v1(40.64,9.652) 40.64,8.128 ; X7.6 40.64,8.128 ; HG1.10 61.81,65.036 ; HG1.9 64.35,64.528 ; HG1.8 66.89,64.782 ; 68.834,65.036 66.89,65.036 61.81,65.036 ; HG1.7 69.43,64.782 ; 69.43,65.036 69.1,65.036 70.358,66.294 74.51,66.294 ; HG1.5 74.51,66.294 ; HG1.1@84.582,62.484 84.582,66.04 84.836,66.294 ; 84.838,66.296 84.836,66.294 ; R21.2 100.353,64.039 100.584,64.039 100.584,66.294 84.836,66.294 ; 2.204,43.77 2.204,52.705 2.204,67.31 9.398,67.31 ; 9.398,67.31 28.956,67.31 ; C8.1@14.748,50.192 14.848,50.292 14.848,49.992 14.748,50.092 C8.1@14.748,50.192 ; 28.956,67.31 35.052,67.31 ; 35.052,67.31 60.198,67.31 61.81,65.698 61.81,65.036 ; 74.51,66.294 84.836,66.294
  Bottom Layer w1: v1(30.734,32.004) 30.734,11.684 v1(34.29,8.128) ; v1(35.052,62.23) 35.052,18.288 36.576,16.764 v1(36.576,8.128) ; v1(39.878,21.844) 40.64,21.082 v1(40.64,9.652)
NetC3_2: C3.2 DD1.5 ZQ1.3 | length 18.8
  Top Layer w0.2: DD1.5 66.934,49.288 71.299,44.923 71.582,44.923 ZQ1.3@71.882,44.623
  Top Layer w0.5: ZQ1.3 71.882,44.623 71.882,45.047 72.032,45.197 72.739,45.197 74.278,46.736 C3.2
NetC4_2: C4.2 DD1.6 ZQ1.1 | length 18.5
  Top Layer w0.2: DD1.6 67.06,49.788 70.029,52.757 71.582,52.757 ZQ1.1@71.882,53.057
  Top Layer w0.5: ZQ1.1 71.882,53.057 71.882,52.633 72.032,52.483 72.739,52.483 74.93,50.292 C4.2
NetC8_2: C8.2 C10.1 C11.2 DA2.3 DA3.3 X6.1 | length 49
  Top Layer w1: X6.1@4.064,61.468 4.318,61.214 4.318,52.8 C10.1 8.096,52.292 10.414,54.61 16.764,54.61 ; DA2.3 20.272,46.75 20.272,46.768 17.048,49.992 16.848,49.992 16.748,50.092 C8.2 16.764,50.308 16.764,54.61 ; C11.2 21.654,65.024 21.068,64.438 DA3.3 16.764,58.114 16.764,54.61
NetDA1_2: DA1.2 R7.2 R8.1 R9.2 VD1.1 VD2.2 | length 21.3
  Top Layer w0.5: R7.2 25.4,29.432 VD1.1 VD2.2 32.988,25.622 33.036,25.67 R9.2 37.83,25.67 R8.1 37.923,25.577 42.67,25.577 DA1.2
NetDA1_3: DA1.3 R1.2 R2.1 VD1.2 VD2.1 | length 30.9
  Top Layer w0.5: R1.2 25.368,21.59 VD1.2 VD2.1 33.56,21.622 36.195,24.257 37.846,24.257 ; R2.1 39.878,18.542 37.846,20.574 37.846,24.257 ; DA1.3 37.846,24.257
NetDA1_5: DA1.5 R10.2 R11.1 VD4.2 VD5.1 | length 29.2
  Top Layer w0.5: R11.1 49.244,21.082 48.72,21.606 DA1.5 51.435,22.987 54.102,20.32 VD5.1 64.548,20.288 VD4.2 68.85,20.272 R10.2
NetDA1_6: DA1.6 R17.2 R18.1 R19.2 VD4.1 VD5.2 | length 23.8
  Top Layer w0.5: DA1.6 55.483,24.257 R18.1 58.912,24.4 R19.2 64.452,24.384 VD5.2 64.548,24.288 VD4.1 68.834,27.844 R17.2
NetDA1_8: DA1.8 R3.1 R5.1 R8.2 R12.1 R18.2 VD3.2 | length 43.3
  Top Layer w0.5: R8.2 37.846,31.457 39.155,32.766 44.196,32.766 44.704,32.258 R3.1 46.736,30.48 ; R5.1 46.736,35.814 ; VD3.2 46.736,35.814 ; DA1.8 R12.1@48.72,30.432 ; R18.2 55.626,30.734 53.848,32.512 49.784,32.512 48.72,31.448 R12.1@48.72,30.48 ; 46.736,30.48 R12.1@48.72,30.48 ; 46.736,30.48 46.736,35.814 ; R12.1@48.72,30.432 R12.1@48.72,30.48 ; R12.1@48.72,30.432 R12.1 R12.1@48.72,30.48
NetDD1_2: DD1.2 R15.1 | length 41.8
  Top Layer w0.2: DD1.2 65.242,47.788 68.072,44.958 68.072,41.402 69.596,39.878 81.026,39.878 85.09,35.814 85.09,32.469 89.111,28.448 R15.1
NetDD1_44: DD1.44 R13.2 | length 4.7
  Top Layer w0.2: R13.2 60.44,41.628 DD1.44
NetHG1_3: HG1.3 R21.3 | length 27.9
  Top Layer w1: HG1.3@79.502,62.484 79.502,58.674 87.376,50.8 96.774,50.8 98.044,52.07 R21.3
NetHG1_16: HG1.16 R22.1 | length 2.5
  Top Layer w0.5: HG1.16@46.482,62.484 46.498,62.5 R22.1
NetHL1_1: HL1.1 R15.2 | length 2.8
  Top Layer w0.5: R15.2@95.812,28.448 HL1.1@98.642,28.448
NetHL2_1: HL2.1 R20.2 | length 6.1
  Top Layer w1: R20.2 5.334,42.034 6.076,41.292 HL2.1
NetR1_1: R1.1 R4.2 X1.1 | length 18
  Top Layer w0.5: R4.2 20.066,19.558 21.04,18.584 23.018,18.584 23.368,18.234 R1.1 X1.1
NetR4_1: R4.1 R7.1 X1.2 | length 26.2
  Top Layer w0.5: X1.2 18.368,23.956 18.972,24.56 R4.1 20.066,28.194 21.336,29.464 23.168,29.464 23.368,29.264 R7.1
NetR10_1: R10.1 R14.2 X2.1 | length 16.9
  Top Layer w0.5: X2.1 70.826,16.93 R10.1 73.342,16.954 74.168,17.78 R14.2
NetR14_1: R14.1 R17.1 X2.2 | length 36.3
  Top Layer w0.5: X2.2 68.41,4.826 74.422,4.826 76.2,6.604 76.2,21.59 74.168,23.622 74.168,25.654 71.946,27.876 R17.1
NRST: C2.2 DD1.7 R16.2 SB2.1 X7.5 | length 171.2
  Top Layer w0.2: DD1.7 63.744,50.292 66.04,50.292 68.834,53.086 68.834,56.388 69.342,56.896 v1(76.708,56.896)
  Top Layer w0.5: C2.2 7.112,24.13 ; 7.366,24.13 7.112,24.13 ; 7.382,24.13 R16.2 ; SB2.1@7.838,29.52 7.906,29.452 7.906,24.384 ; v1(43.434,50.8) 41.148,50.8 10.617,20.269 7.112,20.269 ; X7.5 42.418,4.064 17.526,4.064 7.112,14.478 7.112,20.269 ; 7.112,20.269 7.112,24.13
  Top Layer w1: SB2.1@7.838,29.52 SB2.1@7.838,36.52
  Bottom Layer w0.5: v1(43.434,50.8) 52.05,59.416 62.751,59.416 62.855,59.52 74.084,59.52 v1(76.708,56.896)
R/S: DD1.10 HG1.4 | length 20.7
  Top Layer w0.2: DD1.10 63.74,51.834 65.55,51.834 67.818,54.102 67.818,57.658 70.358,60.198 76.2,60.198 77.05,61.048 HG1.4
Start: C1.2 DD1.4 R6.2 SB1.1 | length 52.7
  Top Layer w0.2: DD1.4 63.759,48.769 64.58,48.769 65.532,48.768 68.707,45.593 68.707,41.783 69.85,40.64 87.884,40.64 93.416,46.172 SB1.1@95.794,46.172
  Top Layer w0.5: R6.2 C1.2 95.794,35.58 95.794,39.172 SB1.1@95.794,46.172
SWCLK: DD1.37 X7.4 | length 47.1
  Top Layer w0.2: DD1.37 56.94,43.07 56.945,43.065 v1(56.945,42.623)
  Top Layer w1: X7.4 54.61,16.256 v1(59.436,16.256)
  Bottom Layer w1: v1(56.945,42.623) 59.436,40.132 v1(59.436,16.256)
SWDIO: DD1.34 X7.3 | length 62.4
  Top Layer w0.2: v1(51.816,45.466) 51.816,46.139 53.965,48.288 DD1.34
  Top Layer w1: X7.3 46.482,4.064 48.1,2.446 48.928,2.446 49.022,2.54 55.118,2.54 57.404,4.826 v1(57.404,8.89)
  Bottom Layer w1: v1(51.816,45.466) 51.816,41.656 56.388,37.084 56.388,9.906 v1(57.404,8.89)
UART1_RX1: DD1.31 X3.2 | length 60.3
  Top Layer w0.2: 51.562,50.292 52.07,49.784 55.636,49.784 DD1.31
  Top Layer w0.5: 51.562,50.292 51.308,50.546 48.26,50.546 47.244,49.53 47.244,48.123 64.633,30.734 74.422,30.734 80.772,24.384 80.772,20.066 80.01,19.304 X3.2
UART1_RX2: DD1.13 X4.2 | length 58
  Top Layer w0.2: DD1.13@62.484,54.61 62.394,54.52 62.394,54.102 62.738,54.102 63.478,54.842 v1(63.478,58.016)
  Top Layer w0.5: v1(71.882,37.719) 71.882,37.592 73.66,35.814 76.454,35.814 87.63,24.638 87.63,19.812 88.138,19.304 X4.2 X4.2@89.916,19.558
  Bottom Layer w0.5: v1(63.478,58.016) 63.478,49.508 63.246,49.276 69.85,42.672 69.85,39.624 71.882,37.592 v1(71.882,37.719)
UART1_RX3: DD1.22 X5.2 | length 59.4
  Top Layer w0.2: v1(54.61,57.15) 55.743,57.15 56.335,56.558 57.742,56.558 57.894,56.406 57.894,54.955 57.921,54.928 57.921,54.107 DD1.22
  Top Layer w0.5: v1(67.31,37.338) 71.374,33.274 75.438,33.274 82.804,25.908 82.804,19.304 X5.2
  Bottom Layer w0.5: v1(54.61,57.15) 54.61,50.038 v1(67.31,37.338)
UART_TX1: DD1.30 X3.3 | length 57.9
  Top Layer w0.2: 52.832,51.308 53.848,50.292 55.636,50.292 DD1.30
  Top Layer w0.5: 52.832,51.308 52.324,51.816 48.006,51.816 46.228,50.038 46.228,47.498 64.262,29.464 73.406,29.464 78.994,23.876 X3.3
UART_TX2: DD1.12 X4.3 | length 49.6
  Top Layer w0.2: DD1.12 64.027,52.788 64.073,52.834 64.073,53.121 65.786,54.834 v1(65.786,56.134)
  Top Layer w0.5: v1(74.676,37.592) 76.454,37.592 89.662,24.384 X4.3
  Bottom Layer w0.5: v1(65.786,56.134) 65.786,53.086 74.676,44.196 v1(74.676,37.592)
UART_TX3: DD1.21 X5.3 | length 53.7
  Top Layer w0.2: v1(57.912,57.912) 57.912,57.404 58.42,56.896 58.42,54.929 58.421,54.107 DD1.21
  Top Layer w0.5: v1(66.294,42.672) 66.294,40.386 72.136,34.544 76.2,34.544 84.328,26.416 X5.3
  Bottom Layer w0.5: v1(57.912,57.912) 58.42,57.912 59.182,57.15 59.182,49.784 v1(66.294,42.672)
pads on no net: DD1.1 DD1.3 DD1.18 DD1.19 DD1.20 DD1.25 DD1.26 DD1.27 DD1.28 DD1.29 DD1.38 DD1.39 DD1.40 DD1.41 DD1.42 DD1.43 DD1.45 DD1.46 HG1.0 R21.0 X7.1 X7.2

## Polygon pours and split planes (outlines as drawn)
no net on Mechanical 16 (solid): 60.028,25.384
no net on Mechanical 16 (solid): 1.016,69.85 1.27,69.596 103.632,69.596 103.632,0 103.378,-0.254 1.016,-0.254

## Other copper
Top Layer:
  pour cut-out: 19.558,45.974 19.812,46.228 22.606,46.228 22.86,45.974 22.86,44.704 19.558,44.704 19.304,44.958 19.304,46.228
  pour cut-out: 96.774,59.182 96.774,54.102 96.266,53.594 96.774,53.086 96.774,52.07 96.012,51.308 95.758,51.562 87.884,51.562 81.788,57.658
  pour cut-out: 89.603,65.473 98.298,65.473 98.298,61.976 98.298,60.706 94.234,57.404 82.042,57.404 81.788,57.658
  pour cut-out: 86.106,74.676
  pour cut-out: 83.312,61.976 87.376,61.976 88.392,60.96 88.392,59.944 83.82,59.944 82.804,60.96
  pour cut-out: 60.96,62.23 61.214,61.976 69.85,61.976 69.85,61.214 67.056,58.42 67.056,57.15 65.786,57.15 63.754,59.182 63.246,58.674 62.23,58.674
  pour cut-out: 75.946,62.23 75.692,62.484 72.39,62.484 72.39,61.976 71.12,60.706 76.2,60.706 76.454,60.96
  pour cut-out: 70.088,19.034 70.088,15.918 70.07,15.9 69.704,15.9 69.704,18.936 69.606,19.034
  pour cut-out: 69.72,28.708 70.012,28.708 70.012,26.822 69.72,26.822
  pour cut-out: 96.628,36.614 96.92,36.614 96.92,34.506 96.628,34.506
  pour cut-out: 92.548,36.614 92.84,36.614 92.84,34.506 92.791,34.555 92.548,34.555
  pour cut-out: 92.67,36.66
  pour cut-out: 69.342,56.642 74.168,56.642 75.946,54.864 75.946,41.148 69.342,41.148 67.612,42.878 67.612,56.69 69.342,58.42
  pour cut-out: 47.352,66.078 47.644,66.078 47.644,63.97 47.352,63.97
  pour cut-out: 24.654,63.924 24.654,56.905 24.645,56.896 25.146,56.896 25.146,64.008
  pour cut-out: 24.222,19.088 24.514,19.088 24.514,16.98 24.222,16.98
  pour cut-out: 9.776,25.184 10.068,25.184 10.068,23.076 9.776,23.076
  pour cut-out: 4.696,25.184 4.988,25.184 4.988,23.076 4.696,23.076
  pour cut-out: 24.222,30.518 24.514,30.518 24.514,28.41 24.222,28.41
  pour cut-out: 33.49,26.816 33.49,26.2 33.528,26.162 35.56,26.162 35.56,26.924 35.598,26.886 35.56,26.924 35.452,26.816
  pour cut-out: 43.18,55.118 52.07,55.118 52.07,53.848 43.18,53.848
  pour cut-out: 52.527,63.002 52.737,63.212 59.986,63.212 59.986,62.392 62.552,59.826 61.468,58.742 61.468,58.42 58.674,58.42 57.15,56.896 56.134,57.912 54.864,57.912 54.864,58.042 51.388,61.518
  pour cut-out: 50.546,63.754
  pour cut-out: 36.792,26.8 36.792,26.426 37.192,26.826
  pour cut-out: 39.37,32.512 54.918,32.512 56.68,30.75 56.68,25.156 51.318,25.156 49.784,23.622 50.098,23.308 50.098,17.488 41.64,17.488 41.342,17.786 41.666,18.11 41.666,22.433 43.347,22.433 43.774,22.86 43.434,23.2 43.434,26.162 37.056,26.162 36.792,26.426 37.592,27.226 37.592,30.988
  pour cut-out: 43.18,26.162
  pour cut-out: 15.24,53.848 15.24,49.276 18.796,45.72 22.606,45.72 22.86,45.974 22.86,50.038
  pour cut-out: 56.134,46.99 66.04,46.99 67.31,45.72 67.31,42.418 61.398,42.418 61.468,42.348 61.468,34.798 55.372,40.894
  pour cut-out: 52.578,46.482 52.832,46.482 54.864,48.514 57.404,48.514 57.404,47.498 56.642,46.736 56.642,39.624 51.816,44.45
  pour cut-out: 55.903,56.125 55.88,56.103 55.88,54.61 58.166,54.61 58.674,55.118 58.674,56.134
  pour cut-out: 45.472,50.038 45.466,50.044 45.466,53.086 53.848,53.086 54.864,54.102 54.878,54.088 57.44,54.088 57.44,50.074 57.404,50.038
  pour cut-out: 18.796,23.876 19.558,23.876 19.558,19.14 22.606,17.78 20.771,17.78 18.542,17.78
  pour cut-out: 6.096,48.26 11.684,48.26 11.938,48.006 12.7,48.006 13.462,47.244 15.748,47.244 15.748,46.482 16.002,46.228 16.002,39.37 11.684,39.37 6.096,44.958
  pour cut-out: 24.508,63.97 24.8,63.97 24.638,63.808 24.638,52.832 25.908,52.832 26.162,53.086 26.416,52.832 26.416,50.292 26.162,50.038 18.428,50.038 17.773,50.694 17.773,57.105 21.291,57.105 21.844,57.658 21.844,64.262 22.692,64.262 24.508,66.078 24.546,66.04 25.146,66.04 25.146,64.008
  pour cut-out: 26.422,43.428 26.422,41.65 24.892,41.65 24.892,42.926 24.949,42.799 23.241,42.799 23.241,43.053 22.987,43.307 23.006,43.326 24.892,43.434
  pour cut-out: 20.066,42.418
  pour cut-out: 19.518,43.696 19.526,43.688 22.606,43.688 23.368,42.926 23.114,42.672 19.558,42.672 19.518,42.712
Bottom Layer:

## Silkscreen, mask and mechanical layers (free items; w line width, h text height)
Border:
  the board outline again, w0.254
Mechanical 8:
  lines w0.254: 38.54,11.938 54.356,11.938 ; 43.18,9.906 43.18,13.97 ; 48.768,9.906 48.768,13.97 ; 38.54,9.906 54.356,9.906 54.356,13.97 38.54,13.97 38.54,9.906
  text "Vin" at 6.096,66.548 h1.52
  text "GND" at 11.684,66.548 h1.52
  text "TX" at 95.758,21.336 h1.52
  text "RX" at 95.758,18.796 h1.52
  text "GND" at 96.266,16.256 h1.52
  text "Left Dyno" at 90.17,14.986 h1.52 r90
  text "Right Dyno" at 84.836,14.732 h1.52 r90
  text "PC_Port" at 79.756,14.478 h1.52 r90
  text "Left RPM" at 73.914,13.716 h1.52
  text "Right RPM" at 26.67,13.462 h1.52
  text "GND" at 42.418,12.446 h1
  text "SWCLK" at 48.26,12.446 h1
  text "+3.3V" at 53.848,12.446 h1
  text "NRST" at 42.672,10.414 h1
  text "SWDIO" at 48.26,10.414 h1
  text "+3.3V" at 53.848,10.414 h1

## Text inside footprints (layer, text, board x,y; h text height)
X1: Bottom Overlay "1" at 23.568,9.01 h1.27
X2: Bottom Overlay "1" at 71.026,9.01 h1.27
X6: Bottom Overlay "1" at 4.158,59.36 h1.27 r180
X7: Bottom Overlay "5" at 44.294,5.023 h1.27; Bottom Overlay "1" at 49.538,5.05 h1.27; Bottom Overlay "2" at 49.792,7.59 h1.27; Bottom Overlay "6" at 44.45,7.62 h1.27; Bottom Overlay "1" at 50.905,6.193 h1.27 r180; Bottom Overlay "2" at 50.625,8.906 h1.27 r180